# Altium PCB pcb.PcbDoc
Units mm, origin at the board's own origin, x right, y up, seen from the top; angles counter-clockwise.
Board outline 85 x 55 mm, 2 copper layers (Top Layer, Bottom Layer); 53 components, 44 nets, 227 pads, 92 vias.
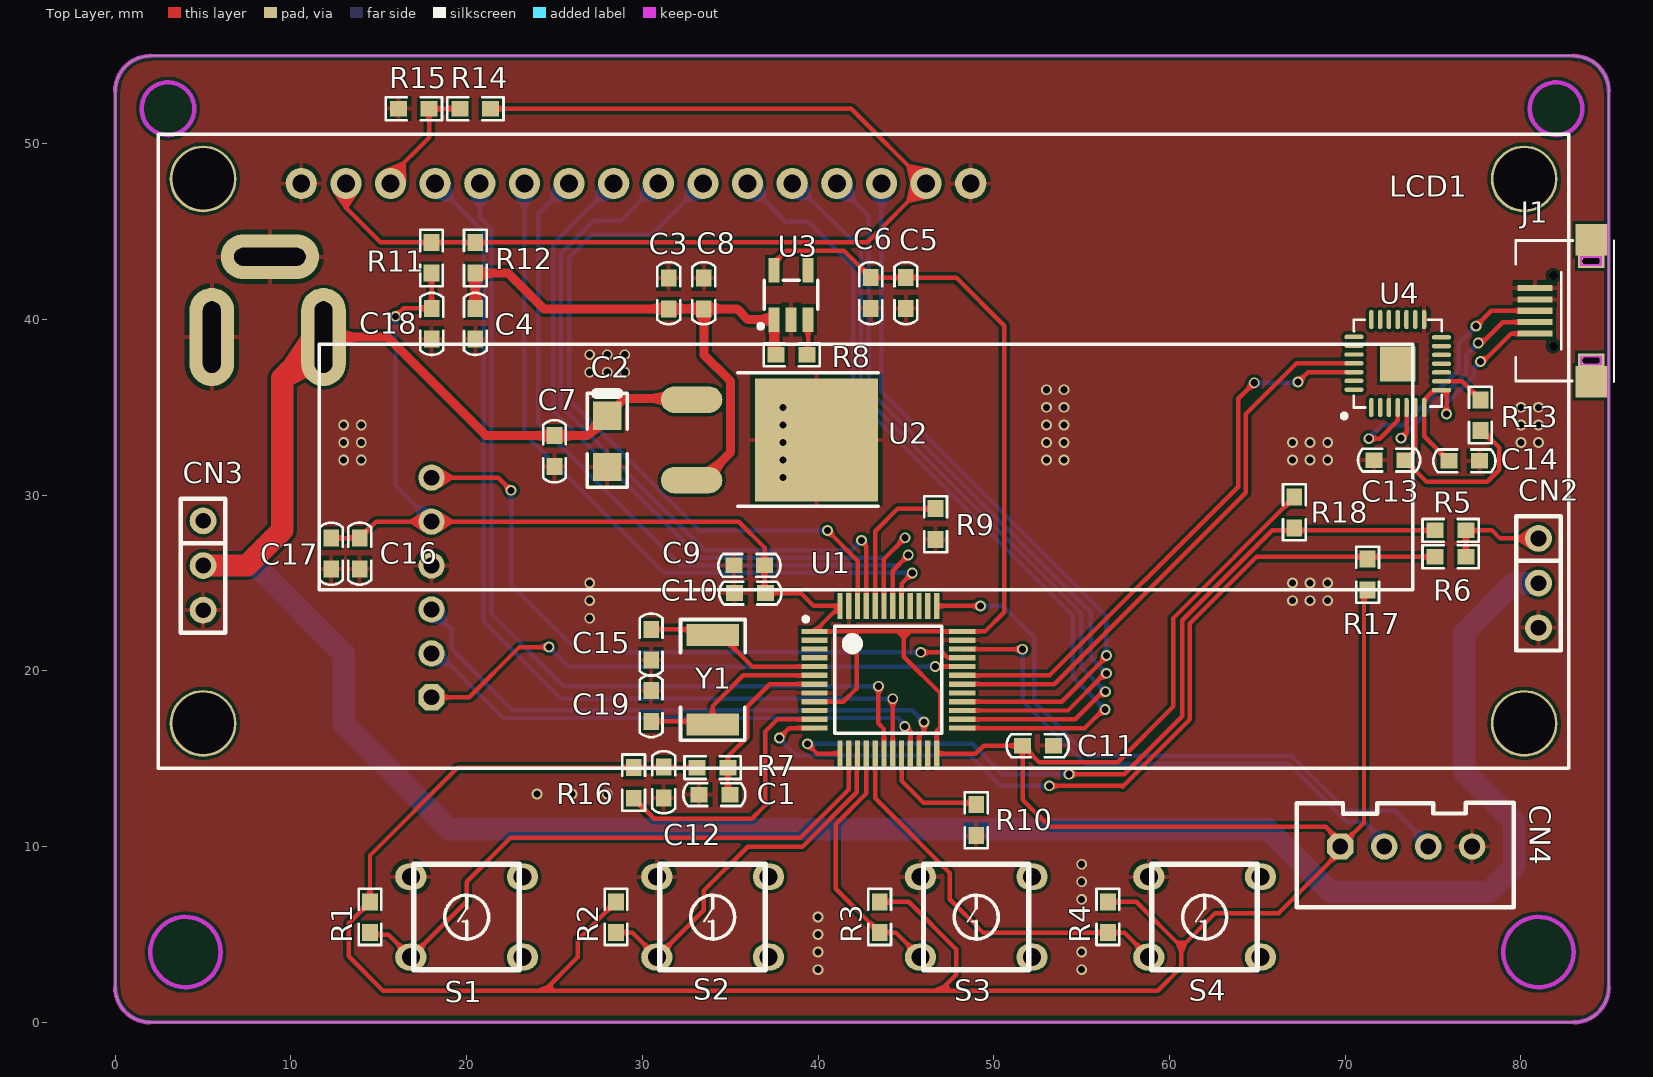
[diagram p0: Top Layer view]
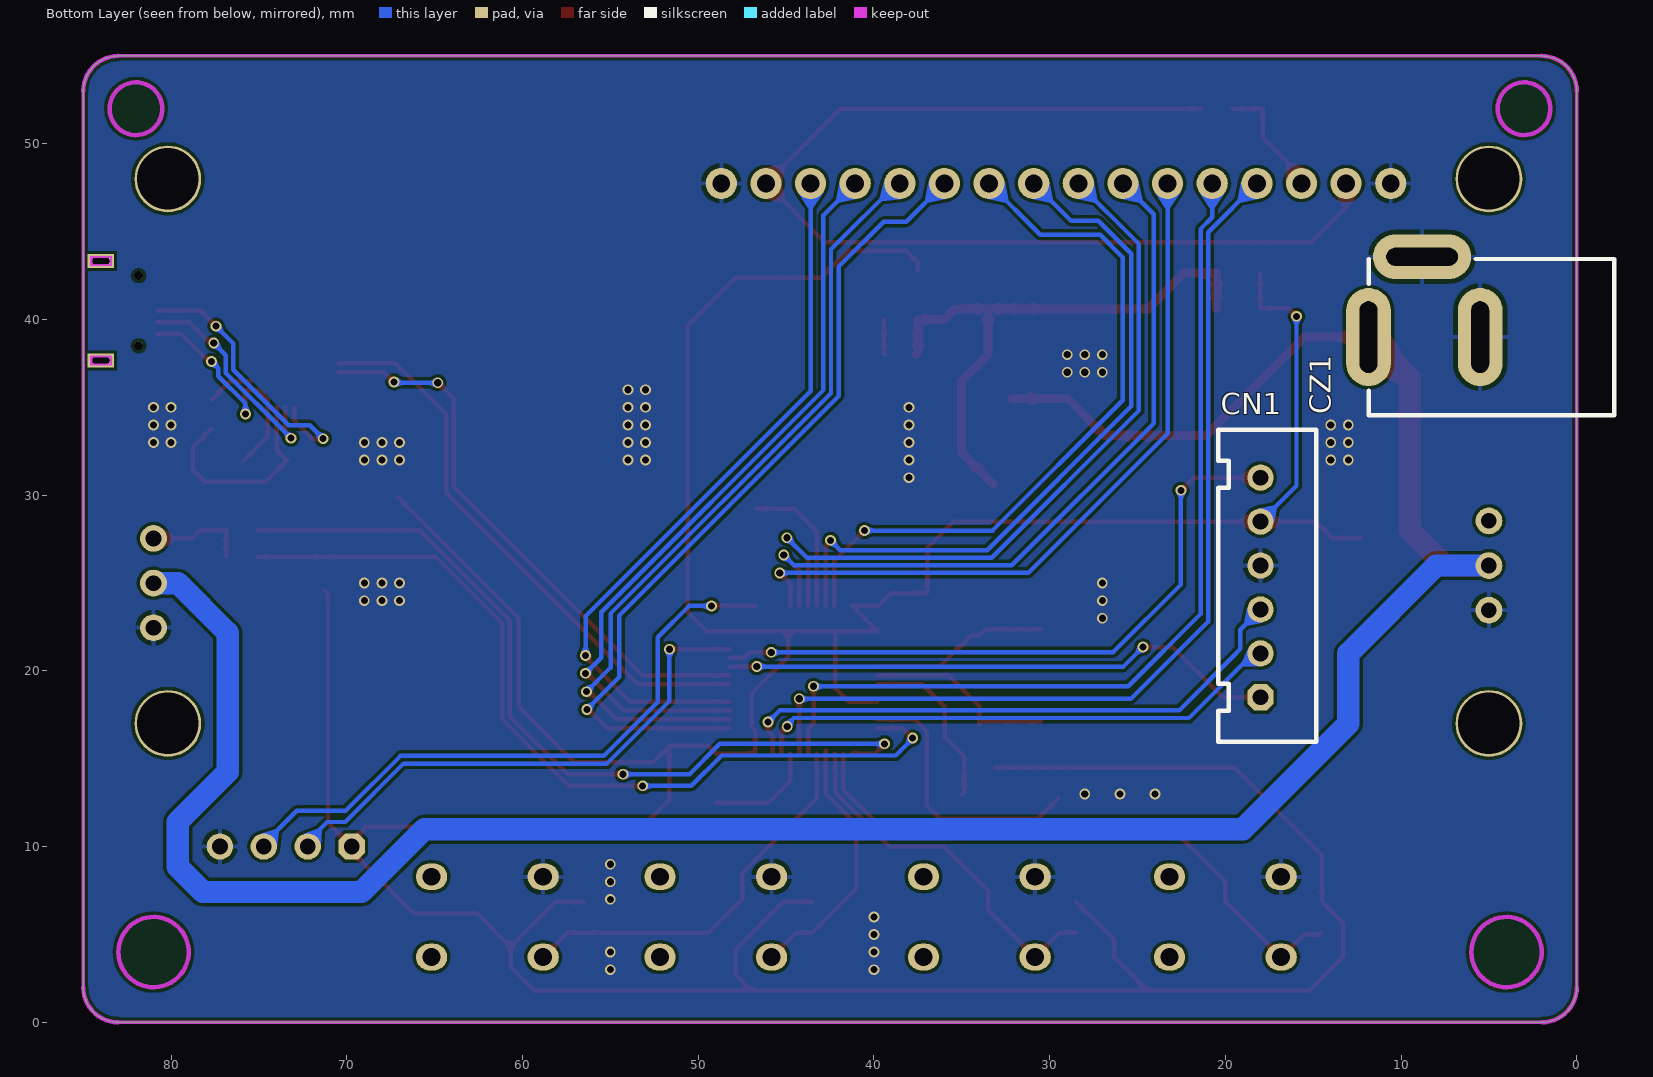
[diagram p1: Bottom Layer view, seen from below]

## Layer stack, top to bottom
Top Solder: solder mask 0.0102, Solder Resist, Dk 3.5
Top Layer: signal copper 0.0356
Dielectric1: dielectric 0.32, FR-4, Dk 4.8
Bottom Layer: signal copper 0.0356
Bottom Solder: solder mask 0.0102, Solder Resist, Dk 3.5

## Board outline
0,2 0,53 cw(c2,53) 2,55 83,55 cw(c83,53) 85,53 85,2 cw(c83,2) 83,0 2,0 cw(c2,2)

## Design rules (kind name [scope] priority, off if disabled: settings)
Clearance [All] p1: gap=0.178
ComponentClearance [All] p1: gap=0 collisioncheckmode=3 verticalgap=0 showdistances=TRUE
PlaneConnect PlaneConnect_3 [InNet('VBAT')] p1: planeconnectstyle=Direct reliefexpansion=0.508 reliefentries=4 reliefconductorwidth=0.254 reliefairgap=0.254
PlaneConnect PlaneConnect_2 [InNet('GND')] p2: planeconnectstyle=Direct reliefexpansion=0.508 reliefentries=4 reliefconductorwidth=0.254 reliefairgap=0.254
PlaneConnect PlaneConnect_1 [InNet('VCC3V3')] p3: planeconnectstyle=Direct reliefexpansion=0.508 reliefentries=4 reliefconductorwidth=0.254 reliefairgap=0.254
PlaneConnect [All] p4: planeconnectstyle=Relief reliefexpansion=0.508 reliefentries=4 reliefconductorwidth=0.254 reliefairgap=0.254
PolygonConnect PolygonConnect_2 [IsVia] p1: connectstyle=Direct reliefconductorwidth=0.254 reliefentries=4 polygonreliefangle="90 Angle" airgapwidth=0.254
PolygonConnect PolygonConnect_1 [All vs InNet('VBAT')] p2: connectstyle=Direct reliefconductorwidth=0.254 reliefentries=4 polygonreliefangle="90 Angle" airgapwidth=0.254
PolygonConnect [All] p3: connectstyle=Relief reliefconductorwidth=0.254 reliefentries=4 polygonreliefangle="90 Angle" airgapwidth=0.254
RoutingVias [All] p1: holewidth=0.711 width=1.27 viastyle="Through Hole" minholewidth=0.406 minwidth=1.27 maxholewidth=0.711 maxwidth=1.27
SilkToSolderMaskClearance SilkscreenOverComponentPads [IsPad] p1: minsilkscreentomaskgap=0.254 clearancetoexposedcopper=TRUE
SolderMaskExpansion [All] p1: expansion=0.102
Width [All] p1: maxlimit=1.27 minlimit=0.254 preferedwidth=0.254
27 further rules are at their usual default settings.

## Components (designator, comment, footprint, x,y, rotation, side; value= is the part's Value field where it differs from the comment)
C1 "0.1uF" CAP-0603 34.097,12.964 r180 top
C2 "10uF" CAP-A 28,33 r270 top
C3 "0.1uF" CAP-0603 31.5,41.5 r90 top
C4 "0.1uF" CAP-0603 20.498,39.751 r270 top
C5 "0.1uF" CAP-0603 45,41.5 r270 top
C6 "0.1uF" CAP-0603 43,41.5 r270 top
C7 "0.33uF" CAP-0603 25,32.5 r270 top
C8 "0.1uF" CAP-0603 33.5,41.5 r90 top
C9 "0.1uF" CAP-0603 36.093,26.01 r0 top
C10 "0.1uF" CAP-0603 36.144,24.435 r0 top
C11 "0.1uF" CAP-0603 52.502,15.748 r180 top
C12 "0.1uF" CAP-0603 31.217,13.665 r90 top
C13 "0.1uF" CAP-0603 72.5,32 r180 top
C14 "0.1uF" CAP-0603 76.784,31.953 r0 top
C15 "22P" CAP-0603 30.5,21.5 r90 top
C16 "0.1uF" CAP-0603 13.912,26.678 r270 top
C17 "0.1uF" CAP-0603 12.294,26.67 r270 top
C18 "0.1uF" CAP-0603 18.009,39.751 r270 top
C19 "22P" CAP-0603 30.5,18 r270 top
CN1 "CN-6" CN-6 18,18.5 r90 bottom
CN2 "CN-3" IDC-3×1 81,25 r90 top
CN3 "CN-3" IDC-3×1 5,26 r90 top
CN4 "CN-4" CN-4 69.723,10.008 r0 top
CZ1 "DC 5.0N" DC-005(N) 5.5,39 r0 bottom
J1 "USB-micro" USB-MICRO 83.5,40.5 r90 top
LCD1 "LCD1602" LCD1602 5,48 r0 top locked
R1 "10K" RES-0603 14.5,6 r90 top
R2 "10K" RES-0603 28.5,6 r90 top
R3 "10K" RES-0603 43.5,6 r90 top
R4 "10K" RES-0603 56.5,6 r90 top
R5 "120R" RES-0603 76,28 r0 top
R6 "0R" RES-0603 76,26.5 r0 top
R7 "10K" RES-0603 34,14.5 r0 top
R8 "200K" RES-0603 38.5,38 r0 top
R9 "10K" RES-0603 46.685,28.346 r270 top
R10 "10K" RES-0603 49,11.5 r270 top
R11 "0R" RES-0603 18,43.5 r270 top
R12 "0R" RES-0603 20.5,43.5 r270 top
R13 "4.7K" RES-0603 77.699,34.569 r90 top
R14 "4.7K" RES-0603 20.5,52 r0 top
R15 "1K" RES-0603 17,52 r0 top
R16 "2K" RES-0603 29.5,13.644 r90 top
R17 "3K" RES-0603 71.272,25.476 r270 top
R18 "10K" RES-0603 67.107,29.032 r90 top
S1 "KEY" KEY-6A 20,6 r0 top locked
S2 "KEY" KEY-6A 34,6 r0 top locked
S3 "KEY" KEY-6A 49,6 r0 top locked
S4 "KEY" KEY-6A 62,6 r0 top locked
U1 "STM32F103C" LQFP-48 44,19.5 r0 top locked
U2 "L7805" TO-252 37.5,33.152 r0 top
U3 "spx6205" SOT-23(5) 37.5,40 r0 top
U4 "CP2102" QFN-28 70.5,40 r0 top
Y1 "8MHZ" XTAL-2512 34,19.5 r90 top

## Footprints (in the part's own frame and the unit in brackets; to place one, negate y for a bottom-side part, rotate by r counter-clockwise, add the part's x,y. Pads: shape width x height; smd on the part's side, far side on the other; paste and mask are expansions set on the pad)
CAP-0603 [mil]
  rect 38x35 smd: 1(-35,0) 2(34,0)
  silkscreen extent -70,-26 70,26, body extent -31,-16 32,16, height 12
CAP-A [mm]
  rect 1.6x1.6 smd: 1(-1.524,0) 2(1.397,0)
  silkscreen extent -2.79,-1.14 2.54,1.14, body extent -1.73,-0.84 1.47,0.76, height 1.6
CN-4 [mm]
  oct 1.5x1.5 hole 0.9: 1(0,0)
  round 1.5 hole 0.9: 2(2.5,0) 3(5,0) 4(7.5,0)
  silkscreen extent -2.49,-3.45 9.88,2.49, body extent -2.47,-3.38 9.93,2.37, height 7
CN-6 [mm]
  oct 1.5x1.5 hole 0.9: 1(0,0)
  round 1.5 hole 0.9: 2(2.5,0) 3(5,0) 4(7.5,0) 5(10,0) 6(12.5,0)
  silkscreen extent -2.54,-3.18 15.24,2.41, body extent -2.4,-1.77 15.1,2.03, height 6
DC-005(N) [mil]
  oval 100x220 hole 40 slot 160 at 90 deg: 1(250,0) 2(0,0)
  oval 220x100 hole 40 slot 160 at 0 deg: 3(130,-180)
  silkscreen extent -300,-175 250,175, body extent -299,-192 245,182, height 434
IDC-3×1 [mil]
  round 60 hole 35: 1(100,0) 2(0,0) 3(-100,0)
  silkscreen extent -151,-50 150,50, body extent -150,-50 150,50, height 315
KEY-6A [mil]
  oval 70x60 hole 40: 1(-125,90) 2(-125,-90) 3(125,-90) 4(125,90)
  silkscreen extent -118,-118 118,118, body extent -153,-122 152,122, height 273
LCD1602 [mil]
  round 149.61 hole 137.8: 0(0,-1220) 0(0,0) 0(2960,-1220) 0(2960,0)
  round 70 hole 40: 1(220,-10) 2(320,-10) 3(420,-10) 4(520,-10) 5(620,-10) 6(720,-10) 7(820,-10) 8(920,-10) 9(1020,-10) 10(1120,-10) 11(1220,-10) 12(1320,-10) 13(1420,-10) 14(1520,-10) 15(1620,-10) 16(1720,-10)
  silkscreen extent -100,-1320 3060,100, body extent -100,-1352 3070,85, height 644
LQFP-48 [mm]
  rect 1.5x0.3 smd: 1(-4.2,2.75) 2(-4.2,2.25) 3(-4.2,1.75) 4(-4.2,1.25) 5(-4.2,0.75) 6(-4.2,0.25) 7(-4.2,-0.25) 8(-4.2,-0.75) 9(-4.2,-1.25) 10(-4.2,-1.75) 11(-4.2,-2.25) 12(-4.2,-2.75) 25(4.2,-2.75) 26(4.2,-2.25) 27(4.2,-1.75) 28(4.2,-1.25) 29(4.2,-0.75) 30(4.2,-0.25) 31(4.2,0.25) 32(4.2,0.75) 33(4.2,1.25) 34(4.2,1.75) 35(4.2,2.25) 36(4.2,2.75)
  rect 0.3x1.5 smd: 13(-2.75,-4.2) 14(-2.25,-4.2) 15(-1.75,-4.2) 16(-1.25,-4.2) 17(-0.75,-4.2) 18(-0.25,-4.2) 19(0.25,-4.2) 20(0.75,-4.2) 21(1.25,-4.2) 22(1.75,-4.2) 23(2.25,-4.2) 24(2.75,-4.2) 37(2.75,4.2) 38(2.25,4.2) 39(1.75,4.2) 40(1.25,4.2) 41(0.75,4.2) 42(0.25,4.2) 43(-0.25,4.2) 44(-0.75,4.2) 45(-1.25,4.2) 46(-1.75,4.2) 47(-2.25,4.2) 48(-2.75,4.2)
  silkscreen extent -4.82,-3.05 3.05,3.57, body extent -4.5,-4.5 4.5,4.5, height 1.2
QFN-28 [mil]
  rect 78.74x78.74 smd: 0(98,-100)
  oval 10x43.31 smd: 1(39,-197) 2(58.69,-197) 3(78.37,-197) 4(98.06,-197) 5(117.74,-197) 6(137.43,-197) 7(157.11,-197) 15(157,0) 16(137.32,0) 17(117.63,0) 18(97.94,0) 19(78.26,0) 20(58.57,0) 21(38.89,0)
  oval 43.31x10 smd: 8(196,-158) 9(196,-138.31) 10(196,-118.63) 11(196,-98.94) 12(196,-79.26) 13(196,-59.57) 14(196,-39.89) 22(0,-39) 23(0,-58.68) 24(0,-78.37) 25(0,-98.06) 26(0,-117.74) 27(0,-137.43) 28(0,-157.11)
  silkscreen extent -27,-221 197,0, body extent 1,-195 197,1, height 59
RES-0603 [mil] "1/10W"
  rect 38x35 smd: 1(-35,0) 2(34,0)
  silkscreen extent -63,-26 63,26, body extent -31,-16 31,16, height 18
SOT-23(5) [mil]
  rect 25x55 smd: 1(0,0) 2(38,0) 3(76,0) 4(76,110) 5(0,110)
  silkscreen extent -35,-20 98,88, body extent -20,-2 94,108, height 43
TO-252 [mm] "D-PAK  / SOT-428"
  oval 3.5x1.5 smd: 1(-4.699,2.286) 3(-4.699,-2.294)
  rect 7x7 smd: 2(2.405,-0.004)
  silkscreen extent -2.08,-3.79 5.92,3.81, body extent -4.47,-3.3 4.78,3.3, height 2.31
USB-MICRO [mm]
  rect 0.35x2 smd: 1(-1.3,2.7) 2(-0.65,2.7) 3(0,2.7) 4(0.65,2.7) 5(1.3,2.7)
  rect 1.8x1.9 smd: 6(-4.05,-0.55) 6(4.05,-0.55)
  rect 0.8x1.5 hole 0.4 slot 1 at 90 deg: 6(-2.825,-0.5) 6(2.825,-0.5)
  round 0.5 hole 0.5 unplated: ""(-2,1.65) ""(2,1.65)
  Keep-Out Layer lines w0.127: -3.054,0.075 -2.596,0.075 -2.596,-1.043 -3.054,-1.043 -3.054,0.075 ; 2.596,0.075 3.054,0.075 3.054,-1.043 2.596,-1.043 2.596,0.075
  silkscreen extent -4.05,-1.8 4,3.8, body extent -3.69,-3.1 3.69,3.4, height 3.3
XTAL-2512 [mm]
  rect 1.25x3 smd: 1(-2.54,0) 2(2.54,0)
  silkscreen extent -3.45,-1.85 3.43,1.83, body extent -2.24,-0.86 2.28,1.08, height 1

## Part data
C1 C3 C4 C5 C6 C7 C8 C9 C10 C11 C12 C13 C14 C15 C16 C17 C18 C19: library part CAP, "Capacitor"
C2: library part CAP(POL), "Polar Capacitor"
R1 R2 R3 R4 R5 R6 R7 R8 R9 R10 R11 R12 R13 R14 R15 R16 R17 R18: library part RES, "Resistor"
U1: library part STM32F103C(LQFP)
U2: library part 78XX
U3: library part SP6205(FIXED)
U4: library part MPU6050_1
Y1: library part XTAL(1), "Crystal"

## Via types
v1: diameter 0.61, hole 0.406, Top Layer to Bottom Layer, tented both sides, 92 vias

## Nets (pads, with @x,y where several pads share a name; then routed paths per layer and width w, separated by ;. In a path a pad name is that pad's centre, name@x,y a point inside that pad or via, vN(x,y) a via of type N, cw(c..) or ccw(c..) an arc to the next point about the centre after c; other vN are vias at no path point)
BLE-KEY: CN1.6 U1.33 | length 37.6
  Top Layer w0.254: CN1.6 21.807,31 v1(22.53,30.277) ; v1(45.847,21.057) 47.062,21.057 47.369,20.75 U1.33
  Bottom Layer w0.254: v1(22.53,30.277) 22.53,24.917 26.391,21.057 v1(45.847,21.057)
BLE-RX: CN1.2 U1.21 | length 30.4
  Top Layer w0.254: v1(44.933,16.84) 45.263,16.51 45.263,15.313 U1.21
  Bottom Layer w0.254: CN1.2 18.395,21 22.073,17.323 44.577,17.323 44.933,16.967 v1(44.933,16.84)
BLE-S: CN1.1 U1.32 | length 31.8
  Top Layer w0.254: CN1.1 20.151,18.5 23.012,21.361 v1(24.689,21.361) ; v1(46.666,20.25) U1.32
  Bottom Layer w0.254: v1(24.689,21.361) 25.8,20.25 v1(46.666,20.25)
BLE-TX: CN1.3 U1.22 | length 33.2
  Top Layer w0.254: U1.22 45.75,16.286 46.025,16.561 v1(46.025,17.094)
  Bottom Layer w0.254: CN1.3 19.152,22.348 19.152,21.254 19.356,21.05 19.356,21.03 22.631,17.755 45.364,17.755 v1(46.025,17.094)
BOOT0: R9.1 U1.44 | length 8.2
  Top Layer w0.254: U1.44 43.25,27.959 44.526,29.235 R9.1
BOOT1: R10.1 U1.20 | length 6.3
  Top Layer w0.254: U1.20 44.75,13.75 46,12.5 R10.1@49,12.5
CP2102-RX: U1.30 U4.25 | length 32.5
  Top Layer w0.254: U1.30 53.438,19.25 64.338,30.15 64.338,34.62 67.227,37.509 U4.25
CP2102-TX: U1.31 U4.26 | length 32.4
  Top Layer w0.254: U1.31 53.176,19.75 63.906,30.48 63.906,35.485 v1(64.821,36.399) ; v1(67.31,36.449) 67.335,36.449 67.896,37.009 U4.26
  Bottom Layer w0.254: v1(64.821,36.399) 67.286,36.399 67.31,36.424 v1(67.31,36.449)
GND: C1.2 C2.2 C3.2 C4.2 C5.2 C6.2 C7.2 C8.2 C9.1 C10.1 C11.1 C12.1 C13.2 C14.2 C15.1 C16.2 C17.2 C18.2 C19.1 CN1.4 CN2.3 CN3.3 CN4.4 CZ1.2 CZ1.3 J1.4 J1.5 LCD1.1 LCD1.16 R9.2 R10.2 R15.1 S1.1 S2.1 S3.1 S4.1 U1.8 U1.23 U1.35 U1.47 U2.2 U3.2 U4.3 U4.15
  other v1: 40,3 55,3 40,4 55,4 40,5 40,6 55,7 55,8 55,9 24,13 26,13 28,13 27,23 27,24 67,24 68,24 69,24 27,25 67,25 68,25 69,25 38,31 13,32 14,32 38,32 53,32 54,32 67,32 68,32 69,32 13,33 14,33 38,33 53,33 54,33 67,33 68,33 69,33 80,33 81,33 13,34 14,34 38,34 53,34 54,34 80,34 81,34 38,35 53,35 54,35 80,35 81,35 53,36 54,36 27,37 28,37 29,37 27,38 28,38 29,38
KEY1: R1.1 S1.2 U1.14 | length 34.5
  Top Layer w0.254: R1.1 14.611,5 15.539,5 S1.2 20,6.889 20,8 22.5,10.5 39,10.5 41.75,13.25 U1.14
KEY2: R2.1 S2.2 U1.15 | length 21
  Top Layer w0.254: R2.1 29.428,5.111 S2.2 33.5,6.389 33.5,7.5 36,10 39.111,10 42.205,13.094 42.205,15.255 U1.15
KEY3: R3.1 S3.2 U1.16 | length 15
  Top Layer w0.254: U1.16@42.75,15.455 U1.16 42.75,13.029 41,11.279 41,7.611 R3.1 44.428,5.111 S3.2
KEY4: R4.1 S4.2 U1.17 | length 22.7
  Top Layer w0.254: U1.17 43.25,12.75 47.5,8.5 47.5,7 49.389,5.111 R4.1 57.428,5.111 S4.2
LCD-B0: LCD1.7 U1.42 | length 42.3
  Top Layer w0.254: U1.42 44.25,25.708 v1(45.136,26.594)
  Bottom Layer w0.254: LCD1.7 24.079,45.997 24.079,34.087 32.156,26.01 44.552,26.01 v1(45.136,26.594)
LCD-B1: LCD1.8 U1.43 | length 42.7
  Top Layer w0.254: U1.43 43.75,26.376 v1(44.958,27.584)
  Bottom Layer w0.254: LCD1.8 24.917,44.295 24.917,34.823 33.299,26.441 43.815,26.441 v1(44.958,27.584)
LCD-B2: LCD1.9 U1.45 | length 40.5
  Top Layer w0.254: v1(42.469,27.432) 42.469,27.407 42.75,27.125 U1.45
  Bottom Layer w0.254: LCD1.9 28.78,45.618 27.229,45.618 25.349,43.739 25.349,35.077 33.553,26.873 41.91,26.873 v1(42.469,27.432)
LCD-B3: LCD1.10 U1.46 | length 40.3
  Top Layer w0.254: v1(40.538,27.991) 42.25,26.279 U1.46
  Bottom Layer w0.254: LCD1.10 30.533,44.831 27.127,44.831 25.832,43.536 25.832,35.408 33.249,27.991 v1(40.538,27.991)
LCD-B4: LCD1.11 U1.25 | length 47.7
  Top Layer w0.254: U1.25 55.18,16.75 v1@56.286,17.856
  Bottom Layer w0.254: LCD1.11 38.166,45.568 39.446,45.568 42.012,43.002 42.012,35.634 54.507,23.139 54.507,19.636 v1(56.337,17.805)
LCD-B5: LCD1.12 U1.26 | length 45.2
  Top Layer w0.254: U1.26 54.639,17.25 56.21,18.821 v1(56.363,18.821)
  Bottom Layer w0.254: LCD1.12 38.69,47.746 42.443,43.993 42.443,35.813 54.991,23.265 54.991,20.193 v1(56.363,18.821)
LCD-B6: LCD1.13 U1.27 | length 43.3
  Top Layer w0.254: U1.27 54.224,17.75 56.337,19.863 v1(56.413,19.863)
  Bottom Layer w0.254: LCD1.13 42.875,45.939 42.875,35.992 55.524,23.343 55.524,20.752 v1(56.413,19.863)
LCD-B7: LCD1.14 U1.28 | length 41.5
  Top Layer w0.254: U1.28 53.862,18.25 56.413,20.801 v1(56.413,20.879)
  Bottom Layer w0.254: LCD1.14 43.608,35.919 56.413,23.114 v1(56.413,20.879)
LCD-E: LCD1.6 U1.41 | length 41.7
  Top Layer w0.254: U1.41 44.75,24.963 v1(45.364,25.578)
  Bottom Layer w0.254: LCD1.6 23.288,33.506 31.217,25.578 v1(45.364,25.578)
LCD-RS: LCD1.4 U1.19 | length 54.3
  Top Layer w0.254: U1.19 v1(44.25,18.415)
  Bottom Layer w0.254: LCD1.4 20.98,44.974 20.98,22.809 25.375,18.415 v1(44.25,18.415)
LCD-RW: LCD1.5 U1.18 | length 52.5
  Top Layer w0.254: v1(43.434,19.126) 43.434,17.018 43.75,16.702 U1.18
  Bottom Layer w0.254: LCD1.5 20.748,45.817 21.412,45.152 21.412,23.241 25.527,19.126 v1(43.434,19.126)
NetC1_1: C1.1 R7.2 U1.7 | length 9.9
  Top Layer w0.254: C1.1 34.864,13.086 R7.2 34.864,15.128 35.966,16.231 35.966,17.966 37.25,19.25 U1.7
NetC13_1: C13.1 R13.1 U4.6 | length 12.2
  Top Layer w0.254: U4.6 73.991,32.563 73.427,32 C13.1 74.63,30.759 78.08,30.759 78.765,31.445 78.765,32.715 R13.1@77.699,33.782
NetCN2_1: CN2.1 R5.2 R6.2 | length 5.8
  Top Layer w0.254: R6.2 R5.2 78.35,28 78.81,27.54 CN2.1
NetJ1_2: J1.2 U4.5 | length 12.8
  Top Layer w0.254: v1(73.177,33.249) 73.491,33.562 U4.5 ; v1(77.572,38.659) 77.775,38.659 78.966,39.85 J1.2
  Bottom Layer w0.254: v1(73.177,33.249) 73.482,33.553 ; 73.483,33.553 76.886,36.956 76.886,37.973 v1(77.572,38.659)
NetJ1_3: J1.3 U4.4 | length 16.2
  Top Layer w0.254: v1(71.349,33.223) 71.958,33.223 72.991,34.256 U4.4 ; v1(77.445,39.624) 78.321,40.5 J1.3
  Bottom Layer w0.254: v1(71.349,33.223) 72.111,33.985 73.304,33.985 76.454,37.135 76.454,38.633 v1(77.445,39.624)
NetLCD1_2: LCD1.2 LCD1.15 R11.1 R12.1 R14.2 | length 63.2
  Top Layer w0.254: LCD1.2 13.128,46.372 15.111,44.389 R11.1 R12.1 42.791,44.389 LCD1.15 41.894,52 R14.2
NetLCD1_3: LCD1.3 R14.1 R15.2 | length 6.9
  Top Layer w0.254: LCD1.3 15.668,48.168 17.864,50.364 R15.2 R14.1
NetR8_2: R8.2 U3.3 | length 2
  Top Layer w0.254: R8.2 39.43,38.067 U3.3
NetR13_2: R13.2 U4.9 | length 2.7
  Top Layer w0.254: U4.9 76.645,36.487 R13.2
NetR16_1: R16.1 U1.11 | length 15.6
  Top Layer w0.254: R16.1 30.673,11.582 36.22,11.582 36.982,12.344 36.982,16.535 37.697,17.25 U1.11
OSCIN: C15.2 U1.5 Y1.2 | length 10.2
  Top Layer w0.254: C15.2 33.676,22.364 Y1.2 34.46,22.04 36.25,20.25 U1.5
OSCOUT: C19.2 U1.6 Y1.1 | length 11.1
  Top Layer w0.254: C19.2 33.824,17.136 Y1.1 34,18 35.75,19.75 U1.6
SWCLK: CN4.3 U1.37 | length 36.4
  Top Layer w0.254: U1.37 v1@49.149,23.7
  Bottom Layer w0.254: v1(49.251,23.698) 50.521,23.698 52.299,21.92 52.299,18.238 55.373,15.164 66.947,15.164 70.071,12.04 72.847,12.04 75,9.887 CN4.3@75,9.557
SWDIO: CN4.2 U1.34 | length 30.7
  Top Layer w0.254: U1.34 48.216,21.234 v1(51.638,21.234)
  Bottom Layer w0.254: v1(51.638,21.234) 51.638,18.288 55.194,14.732 66.768,14.732 70.095,11.405 71.105,11.405 CN4.2@72.502,10.008
U2-RX: R5.1 R18.1 U1.13 | length 47.5
  Top Layer w0.254: v1(39.395,15.85) 39.945,15.3 U1.13 ; v1(54.28,14.122) 57.429,14.122 60.731,17.424 60.731,22.885 65.846,28 R5.1
  Bottom Layer w0.254: v1(39.395,15.85) 48.768,15.85 50.495,14.122 v1(54.28,14.122)
U2-TX: R6.1 R17.1 U1.12 | length 49.3
  Top Layer w0.254: v1(37.795,16.18) 38.365,16.75 U1.12 ; v1(53.162,13.462) 57.278,13.462 57.329,13.411 61.163,17.246 61.163,22.707 64.957,26.5 R6.1
  Bottom Layer w0.254: v1(37.795,16.18) 37.795,16.154 38.76,15.189 48.666,15.189 50.394,13.462 v1(53.162,13.462)
VBUS: C14.1 J1.1 U4.7 U4.8 | length 14.5
  Top Layer w0.254: v1(75.768,34.62) 75.768,35.987 U4.8 75.052,35.987 74.491,35.425 U4.7 74.491,33.358 C14.1 ; v1(77.699,37.617) 77.876,37.617 79.459,39.2 J1.1
  Bottom Layer w0.254: v1(75.768,34.62) 75.768,35.228 77.318,36.777 77.318,37.236 v1(77.699,37.617)
VCC3V3: C5.1 C6.1 C9.2 C10.2 C11.2 C12.2 C16.1 C17.1 C18.1 CN1.5 CN4.1 R1.2 R2.2 R3.2 R4.2 R7.1 R11.2 R16.2 R17.2 R18.2 U1.1 U1.9 U1.24 U1.36 U1.48 U3.5 | length 285.3
  Top Layer w0.254: C17.1 13.905,27.559 C16.1 14.846,28.5 CN1.5 35.483,28.5 36.957,27.026 C9.2 36.957,24.486 C10.2 39.014,24.435 39.749,23.7 U1.48 U1.1 42.113,22.25 ; v1(15.951,40.183) 16.408,40.64 C18.1 18.009,42.628 R11.2 ; R2.2 26.314,4.678 26.314,3.708 24.409,1.803 ; R7.1 19.5,14.5 14.5,9.5 R1.2 13.284,5.648 13.284,3.759 15.24,1.803 24.409,1.803 ; U3.5 37.5,43.24 38.176,43.917 41.472,43.917 C6.1 C5.1 47.857,42.389 50.597,39.649 50.597,23.343 49.504,22.25 U1.36 44.882,22.25 ; U1.9 41.44,18.25 42.189,18.999 42.189,22.174 42.113,22.25 ; R3.2 45.156,6.864 47.854,4.166 47.854,2.718 46.939,1.803 ; R4.2 58.11,6.864 60.681,4.293 ; R18.2 60.223,23.012 60.223,17.983 57.048,14.808 52.578,14.808 C11.2 ; CN4.1 CN4.1@69.863,10.147 ; R17.2 71.069,24.409 71.069,11.354 CN4.1@69.863,10.147 ; 24.409,1.803 46.939,1.803 ; 42.113,22.25 44.882,22.25 ; 44.882,22.25 44.882,20.803 46.965,18.72 46.965,16.815 46.75,16.6 U1.24 48.98,15.3 49.428,15.748 C11.2 ; 46.939,1.803 59.334,1.803 60.681,3.15 60.681,4.293 ; C11.2 51.638,12.675 53.188,11.125 68.885,11.125 CN4.1@69.863,10.147 ; 60.681,4.293 62.611,6.223 66.218,6.223 70.002,10.008 CN4.1@69.863,10.147
  Bottom Layer w0.254: v1(15.951,40.183) 15.951,30.549 CN1.5
VCC5.0: C3.1 C4.1 C8.1 R8.1 R12.2 U2.3 U3.1 | length 33.5
  Top Layer w0.508: C4.1 20.498,42.634 R12.2 22.362,42.636 24.388,40.611 C3.1 C8.1 ; U2.3@33.198,30.632 35.018,32.453 35.018,36.483 33.5,38.001 C8.1 ; R8.1 37.5,38.111 U3.1 36,40 35.389,40.611 C8.1
VCC5.0-8.4: C2.1 C7.1 CN2.2 CN3.2 CZ1.1 U2.1 | length 145.9
  Top Layer w0.508: CZ1.1 15.5,39 21.111,33.389 26.865,33.389 28.985,35.509 U2.1@32.131,35.509
  Top Layer w1.27: CN3.2 7.5,26 9.5,28 9.5,36.65 CZ1.1
  Bottom Layer w1.27: CN3.2 8,26 13,21 13,17 19,11 65.576,11 69.159,7.417 78.181,7.417 79.629,8.865 79.629,11.405 76.784,14.249 76.784,22.174 79.61,25 CN2.2
pads on no net: CN3.1 J1. J1.6 LCD1.0 S1.3 S1.4 S2.3 S2.4 S3.3 S3.4 S4.3 S4.4 U1.2 U1.3 U1.4 U1.10 U1.29 U1.38 U1.39 U1.40 U3.4 U4.0 U4.1 U4.2 U4.10 U4.11 U4.12 U4.13 U4.14 U4.16 U4.17 U4.18 U4.19 U4.20 U4.21 U4.22 U4.23 U4.24 U4.27 U4.28

## Polygon pours and split planes (outlines as drawn)
GND on Bottom Layer "GND_L02_P002" (solid, remove dead copper, pour order 2): 0.199,0.227 85.199,0.227 85.199,55.227 0.199,55.227
GND on Top Layer "GND_L01_P004" (solid, remove dead copper, pour order 4): -0.057,0.405 84.943,0.405 84.943,55.405 -0.057,55.405

## Keep-outs
Keep-Out Layer:
  circle w0.254: c3,52 r1.5
  circle w0.254: c82,52 r1.5
  circle w0.254: c81,4 r2
  circle w0.254: c4,4 r2
  lines w0.2: 0,2 0,53 ; 2,0 83,0 ; 2,55 83,55 ; 85,2 85,53
  lines w0.254: 0,2 ccw(c2,2) 2,0 ; 0,53 cw(c2,53) 2,55 ; 83,0 ccw(c83,2) 85,2 ; 83,55 cw(c83,53) 85,53

## Text inside footprints (layer, text, board x,y; h text height)
U1: Mechanical 15 "1" at 43.836,19.05 h0.75